# Altium PCB STAmeba.PcbDoc (part 1 of 3)
Units mm, origin at the board's own origin, x right, y up, seen from the top; angles counter-clockwise.
Board outline 121.75 x 98.31 mm, 2 copper layers (Top Layer, Bottom Layer); 122 components, 112 nets, 521 pads, 187 vias.
Unrouted connection lines stored in the file: 4.
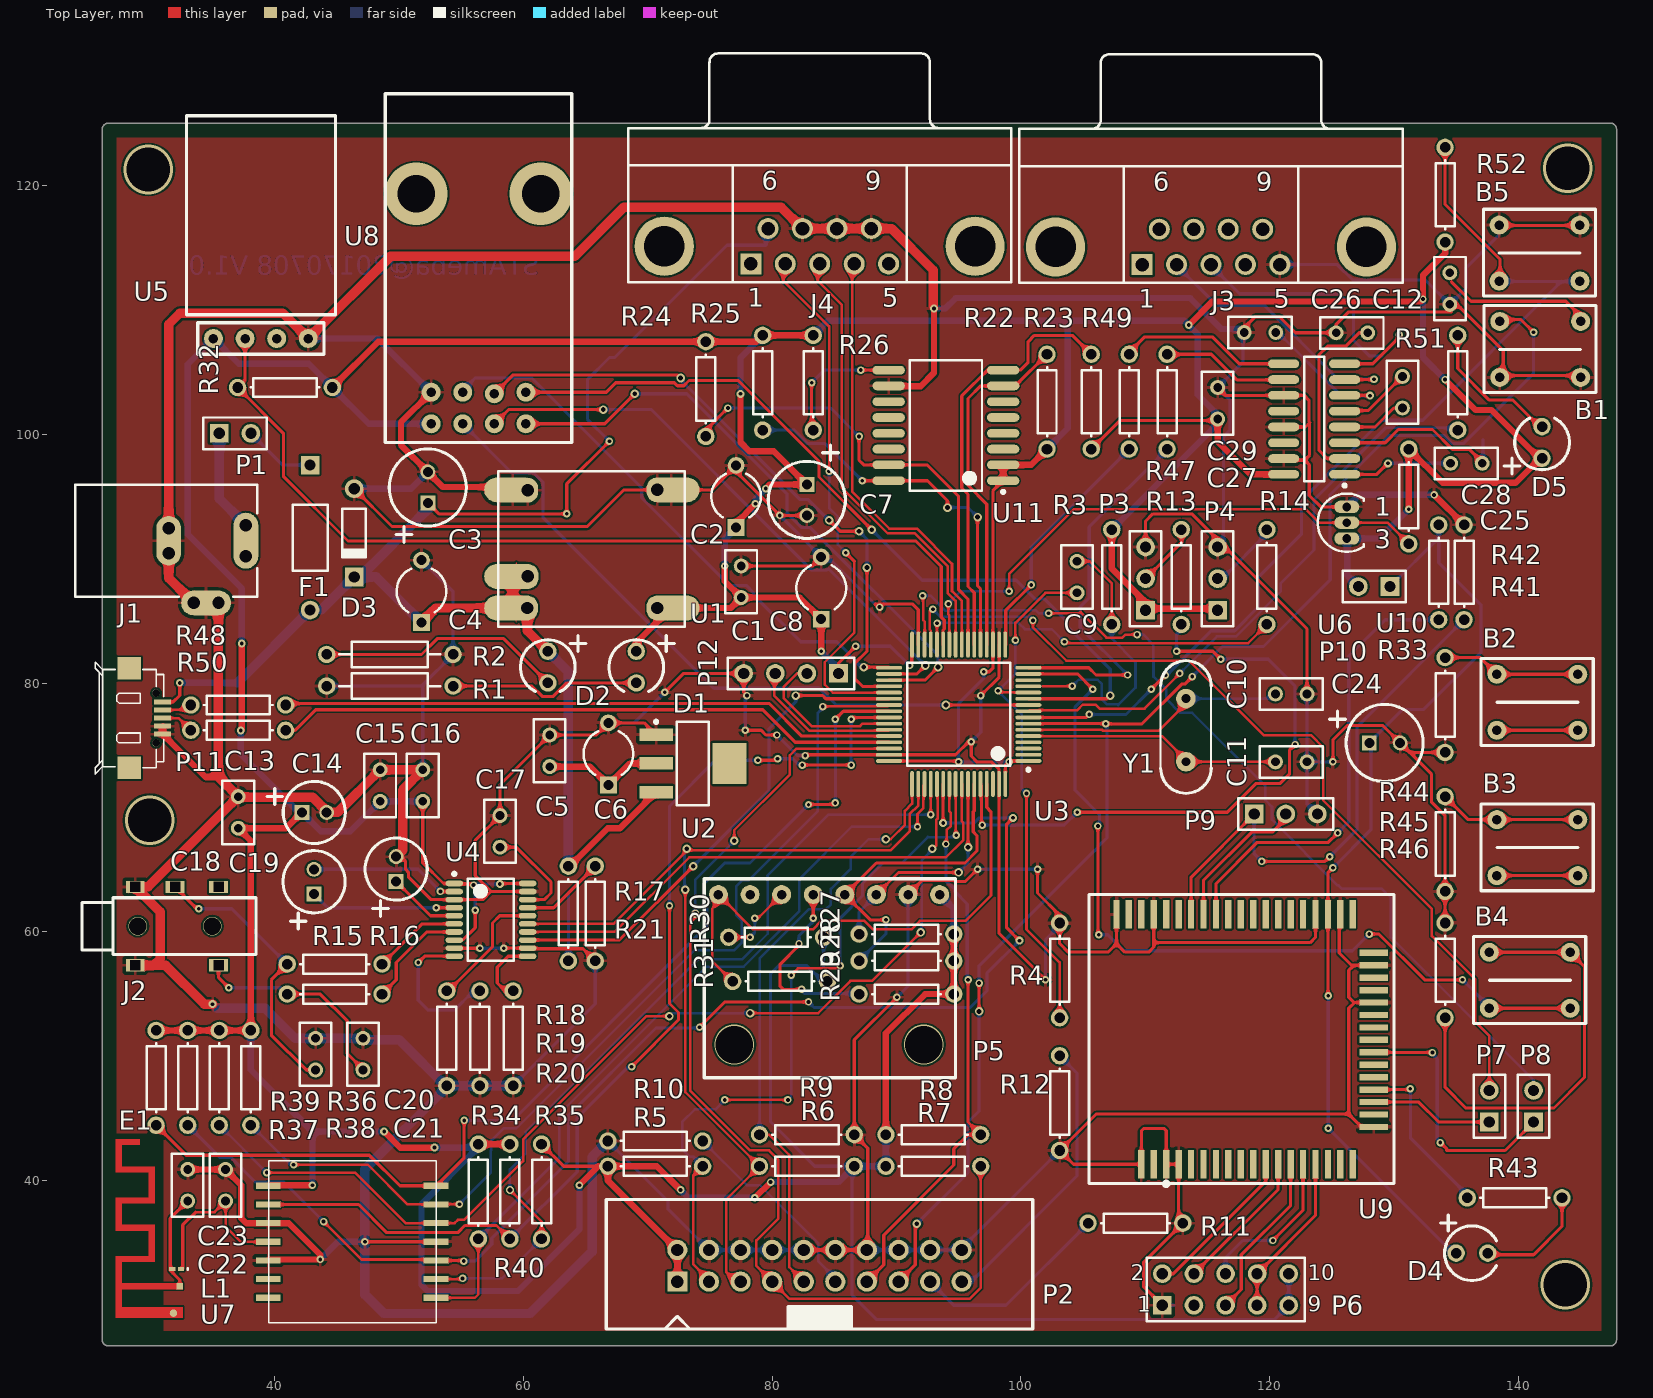
[diagram p0: Top Layer view]
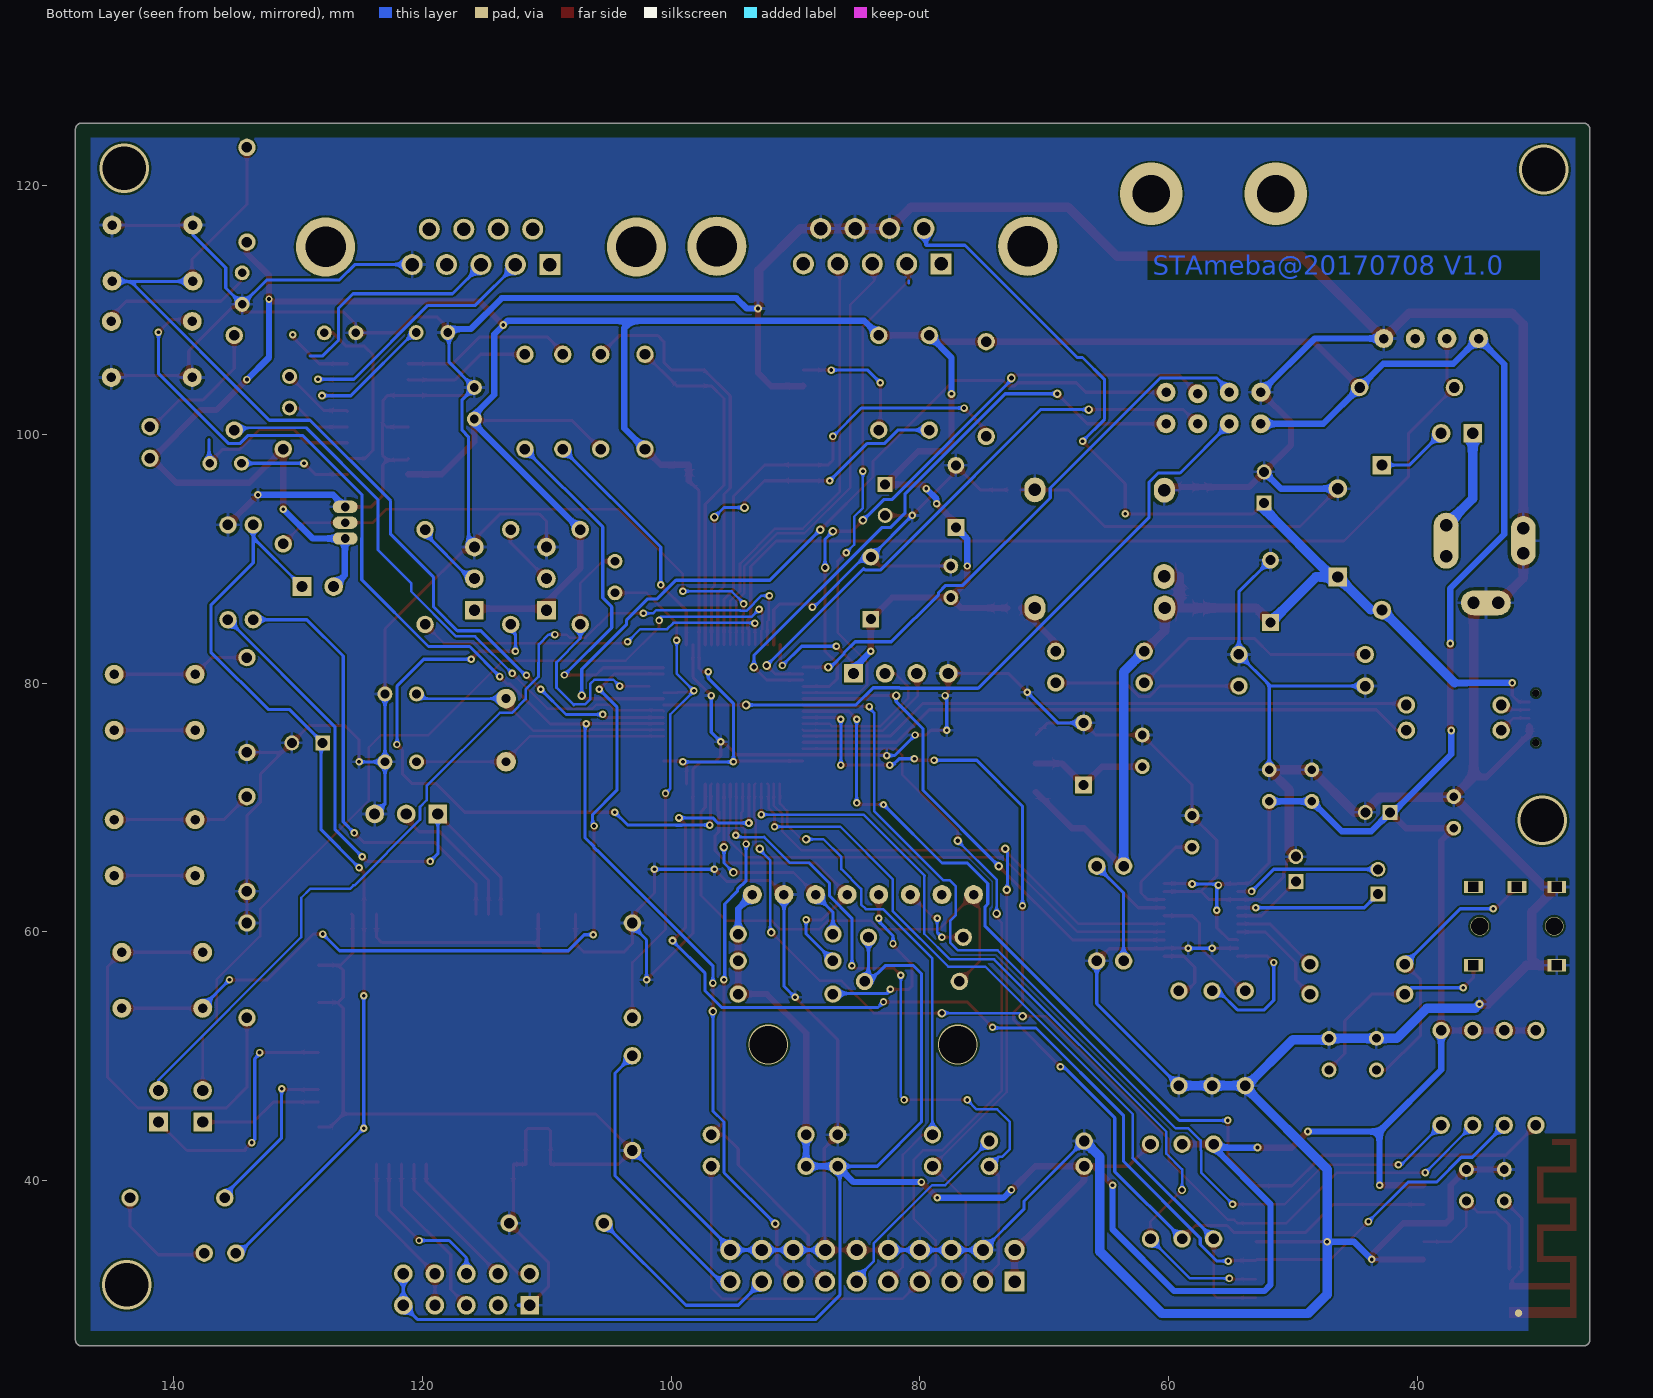
[diagram p1: Bottom Layer view, seen from below]

## Layer stack, top to bottom
Top Solder: solder mask 0.0102, Solder Resist, Dk 3.5
Top Layer: signal copper 0.0356
Dielectric 1: dielectric 0.32, FR-4, Dk 4.8
Bottom Layer: signal copper 0.0356
Bottom Solder: solder mask 0.0102, Solder Resist, Dk 3.5

## Board outline
26.645,26.703 cw(c26.645,27.203) 26.144,27.203 26.144,124.511 cw(c26.645,124.511) 26.645,125.011 147.396,125.011 cw(c147.396,124.511) 147.897,124.511 147.897,27.203 cw(c147.396,27.203) 147.396,26.703

## Design rules (kind name [scope] priority, off if disabled: settings)
Clearance [All] p1: gap=0.152 ignorepadtopadclearanceinfootprint=FALSE
DiffPairsRouting [InDifferentialPair('USB')] p1: maxlimit=0.254 minlimit=0.025 mostfreqgap=0.203 toplayer_minwidth=0.025 toplayer_maxwidth=0.381 toplayer_prefwidth=0.203 bottomlayer_minwidth=0.025 bottomlayer_maxwidth=0.381 bottomlayer_prefwidth=0.203 maxuncoupledlength=12.7
PolygonConnect [All] p1: connectstyle=Relief reliefconductorwidth=0.254 reliefentries=4 polygonreliefangle="90 Angle" airgapwidth=0.254
RoutingVias [All] p1: holewidth=0.686 width=0.381 viastyle="Through Hole" minholewidth=0.127 minwidth=0.254 maxholewidth=0.711 maxwidth=1.27
SolderMaskExpansion [All] p1: expansion=0.102
UnRoutedNet [All] p1: checkbadconnections=TRUE
Width [All] p1: maxlimit=1.27 minlimit=0.152 preferedwidth=0.381 minimp=50.000000 maximp=50.000000 favimp=50.000000
28 further rules are at their usual default settings.

## Classes and differential pairs
component class 01_Power: C1 C2 C3 C4 C5 C6 D1 D2 D3 F1 J1 P1 R1 R2 U1 U2
component class 02_MCU: B1 C7 C8 C9 C10 C11 C12 P2 P3 P4 R3 R4 R5 R6 R7 R8 R9 R10 R11 R12 R13 R14 U3 Y1
component class 03_PCM5102A: C13 C14 C15 C16 C17 C18 C19 C20 C21 J2 R15 R16 R17 R18 R19 R20 R21 U4
component class 04_Storage&Sensor: P5 R22 R23 R24 R25 R26 R27 R28 R29 R30 R31 R32 R33 U5 U6 U11 U*
component class 05_Wireless: C22 C23 E1 L1 R34 R35 R36 R37 R38 R39 R40 U7 U8
component class 06_RTL8711: B2 B3 B4 C24 D4 P6 P7 P8 P9 P10 R41 R42 R43 R44 R45 R46 U9
component class 07_Interface: B5 C25 C26 C27 C28 C29 D5 J3 J4 P11 P12 R47 R48 R49 R50 R51 R52 U10
differential pair USB: +USB_P -USB_N

## Components (designator, comment, footprint, x,y, rotation, side; value= is the part's Value field where it differs from the comment)
B1 "Reset" SWITCH-0.65/0.45 138.506,109.068 r0 top
B2 "Switch" SWITCH-0.65/0.45 138.28,80.7 r0 top
B3 "Switch" SWITCH-0.65/0.45 138.28,69.016 r0 top
B4 "Switch" SWITCH-0.65/0.45 137.668,58.348 r0 top
B5 "SW PUSHBUTTON" SWITCH-0.65/0.45 138.455,116.819 r0 top
C1 "Cap" RAD-0.1 77.521,88.138 r270 top value=100pF
C2 "Cap2" CAPR5-4X5 77.111,94.996 r90 top value=100pF
C3 "Cap Pol1" RB2.5-6.3 52.324,94.472 r90 top value=47uF
C4 "Cap2" CAPR5-4X5 51.816,87.376 r90 top value=0.1uF
C5 "Cap" RAD-0.1 62.123,74.549 r270 top value=100pF
C6 "Cap2" CAPR5-4X5 66.845,74.295 r90 top value=100pF
C7 "Cap Pol1" RB2.5-6.3 82.798,95.972 r270 top value=47uF
C8 "Cap2" CAPR5-4X5 83.954,87.63 r90 top value=0.1uF
C9 "Cap2" RAD-0.1 104.521,88.519 r270 top value=0.1uF
C10 "Cap" RAD-0.1 121.742,79.121 r180 top value=100pF
C11 "Cap" RAD-0.1 121.742,73.66 r180 top value=100pF
C12 "0.1uF/25V" RAD-0.1 134.493,111.709 r90 top value=100pF
C13 "CC0603KRX7R9BB104" RAD-0.1 37.084,69.596 r90 top
C14 "EEE-1HA100WR" RB2-5 43.196,69.596 r0 top
C15 "CC0603KRX7R9BB104" RAD-0.1 48.498,71.755 r90 top
C16 "CC0603KRX7R9BB104" RAD-0.1 51.92,71.755 r90 top
C17 "CC0603KRX7R9BB104" RAD-0.1 58.131,68.072 r90 top
C18 "LMK107B7225KA-T" RB2-5 43.18,64.024 r90 top
C19 "LMK107B7225KA-T" RB2-5 49.784,65.04 r90 top
C20 "2.2nF" RAD-0.1 43.303,50.165 r90 top
C21 "2.2nF" RAD-0.1 47.117,50.165 r90 top
C22 "Cap" RAD-0.1 36.068,39.624 r270 top value=NC
C23 "Cap" RAD-0.1 33.02,39.624 r270 top value=NC
C24 "" RB2.5-6.3 128,75.184 r0 top value=10uF
C25 "105" RAD-0.1 135.822,97.663 r180 top value=100pF
C26 "105" RAD-0.1 126.619,108.153 r180 top value=100pF
C27 "105" RAD-0.1 115.824,102.489 r90 top value=100pF
C28 "105" RAD-0.1 130.683,103.378 r270 top value=100pF
C29 "105" RAD-0.1 119.228,108.179 r180 top value=100pF
D1 "LED1" LED-R3.0 69.088,81.28 r0 top
D2 "LED1" LED-R3.0 61.976,81.28 r0 top
D3 "Diode 1N4733A" DO-35 46.404,92.075 r270 top
D4 "Satus LED1" LED-R3.0 136.271,34.163 r90 top
D5 "LED1" LED-R3.0 141.91,99.339 r180 top
E1 "Antenna" ANT_MEANDER_LINE 27.235,28.946 r90 top
F1 "Fuse 1" PIN-W2/E2.8 42.862,91.694 r270 top
J1 "PWR2.5" KLD-0202 23.996,91.44 r0 top
J2 "PJ-313" PJ-313 32.004,60.452 r0 top
J3 "Joypad" DSUB1.385-2H9 115.291,124.562 r0 top
J4 "Joypad" DSUB1.385-2H9 83.833,124.615 r0 top
L1 "Inductor" 0603 32.123,32.893 r180 top value=10pF
P1 "Header 2" HDR1X2 35.56,100.076 r0 top
P2 "Header 10X2" MHDR2X10_2.54 72.39,31.877 r0 top
P3 "Header 3" HDR1X3 110.029,85.852 r90 top
P4 "Header 3" HDR1X3 115.824,85.852 r90 top
P5 "GY521-MPU6050" GY521-MPU6050 93.472,62.992 r270 top
P6 "Header 5X2" HDR2X5 111.379,29.972 r0 top
P7 "Header 2" HDR1X2 137.668,44.704 r90 top
P8 "Header 2" HDR1X2 141.224,44.704 r90 top
P9 "Header 3" HDR1X3 118.761,69.469 r0 top
P10 "Header 2" HDR1X2 129.678,87.757 r180 top
P11 "Header 5" MICRO_USB 31.005,77.184 r270 top
P12 "Header 4" HDR1X4 85.344,80.772 r180 top
R1 "Res2" AXIAL-0.4 49.276,79.756 r0 top value=4.7K
R2 "Res2" AXIAL-0.4 49.276,82.296 r180 top value=4.7K
R3 "" AXIAL-0.3 107.315,88.519 r90 top value=0
R4 "10k" AXIAL-0.3 103.124,56.896 r90 top value=0
R5 "10k" AXIAL-0.3 70.612,41.148 r0 top
R6 "10k" AXIAL-0.3 82.804,41.148 r180 top
R7 "10k" AXIAL-0.3 92.964,41.148 r0 top
R8 "10k" AXIAL-0.3 92.964,43.688 r0 top
R9 "10k" AXIAL-0.3 82.804,43.688 r180 top
R10 "10k" AXIAL-0.3 70.612,43.18 r0 top
R11 "10k" AXIAL-0.3 109.22,36.576 r180 top
R12 "10k" AXIAL-0.3 103.124,46.228 r90 top value=47k
R13 "Res2" AXIAL-0.3 112.903,88.519 r90 top value=1K
R14 "Res2" AXIAL-0.3 119.786,88.519 r90 top value=1K
R15 "ERJ-3EKF4700V" AXIAL-0.3 44.833,57.404 r180 top
R16 "ERJ-3EKF4700V" AXIAL-0.3 44.833,54.991 r180 top
R17 "ERJ-3GEYJ182V" AXIAL-0.3 63.627,61.468 r90 top
R18 "RC0603JR-070RL" AXIAL-0.3 53.848,51.435 r90 top
R19 "RC0603JR-070RL" AXIAL-0.3 56.515,51.435 r90 top
R20 "RC0603JR-070RL" AXIAL-0.3 59.182,51.435 r90 top
R21 "ERJ-3GEYJ332V" AXIAL-0.3 65.786,61.468 r90 top
R22 "10k" AXIAL-0.3 102.108,102.616 r90 top value=1k
R23 "10k" AXIAL-0.3 105.664,102.616 r270 top value=1k
R24 "10k" AXIAL-0.3 74.676,103.632 r90 top value=1k
R25 "10k" AXIAL-0.3 79.248,104.14 r90 top value=1k
R26 "10k" AXIAL-0.3 83.312,104.14 r90 top value=1k
R27 "10k" AXIAL-0.3 90.805,59.817 r180 top value=4.7k
R28 "10k" AXIAL-0.3 90.805,57.658 r180 top value=4.7k
R29 "10k" AXIAL-0.3 90.805,54.991 r180 top value=4.7k
R30 "10k" AXIAL-0.3 80.327,59.563 r180 top value=4.7k
R31 "10k" AXIAL-0.3 80.645,56.007 r180 top value=4.7k
R32 "10k" AXIAL-0.3 40.841,103.759 r180 top value=4.7k
R33 "10k" AXIAL-0.3 131.192,94.996 r270 top value=4.7k
R34 "10k" AXIAL-0.3 56.388,39.116 r90 top value=4.7k
R35 "10k" AXIAL-0.3 61.468,39.116 r90 top value=4.7k
R36 "10k" AXIAL-0.3 33.02,48.26 r90 top value=4.7k
R37 "10k" AXIAL-0.3 35.56,48.26 r90 top value=4.7k
R38 "10k" AXIAL-0.3 38.1,48.26 r90 top value=4.7k
R39 "10k" AXIAL-0.3 30.48,48.26 r90 top value=4.7k
R40 "10k" AXIAL-0.3 58.928,39.116 r90 top value=4.7k
R41 "" AXIAL-0.3 135.636,88.9 r90 top value=10K
R42 "" AXIAL-0.3 133.604,88.9 r90 top value=10K
R43 "10k" AXIAL-0.3 139.7,38.608 r180 top
R44 "10k" AXIAL-0.3 134.112,78.232 r90 top
R45 "10k" AXIAL-0.3 134.112,67.056 r90 top
R46 "10k" AXIAL-0.3 134.112,56.896 r270 top
R47 "0" AXIAL-0.3 111.76,102.616 r90 top
R48 "Res2" AXIAL-0.3 37.084,78.232 r0 top value=4.7K
R49 "0" AXIAL-0.3 108.712,102.616 r90 top
R50 "Res2" AXIAL-0.3 37.084,76.2 r0 top value=4.7K
R51 "Res2" AXIAL-0.3 135.128,104.14 r90 top value=4.7K
R52 "10k" AXIAL-0.3 134.112,119.253 r270 top
U1 "MP1584" MP1584 65.517,90.779 r180 top
U2 "AMS1117-1.8V" SOT223-4M 73.631,73.533 r0 top
U3 "STM32F103RCT6" STM-LQFP64_M 95.008,77.482 r180 top
U4 "PCM5102A" TSSOP-20-1 57.404,60.96 r0 top
U5 "DHT11" DHT-11 35.094,107.696 r90 top
U6 "DS18B20" TO-92 126.213,92.888 r0 top
U7 "88W8782" W8782 52.997,28.576 r180 top
U8 "CC1101" AS07-M1101D-TH 52.593,100.838 r90 top
U9 "8711AF" "53PIN-MODULE-PLATFORM -2" 116.84,51.308 r90 top
U10 "MAX232ACPE" SO-16_M 123.585,101.219 r180 top
U11 "MX25L25635F" SOL-16_M 93.98,100.711 r180 top
Y1 "XTAL" XTAL1 113.281,78.74 r270 top

## Footprints (in the part's own frame and the unit in brackets; to place one, negate y for a bottom-side part, rotate by r counter-clockwise, add the part's x,y. Pads: shape width x height; smd on the part's side, far side on the other; paste and mask are expansions set on the pad)
"53PIN-MODULE-PLATFORM -2" [mil]
  rect 90x20 smd: 1(-393.7,202.76) 2(-393.7,163.39) 3(-393.7,124.02) 4(-393.7,84.65) 5(-393.7,45.28) 6(-393.7,5.91) 7(-393.7,-33.46) 8(-393.7,-72.83) 9(-393.7,-112.2) 10(-393.7,-151.57) 11(-393.7,-190.94) 12(-393.7,-230.31) 13(-393.7,-269.69) 14(-393.7,-309.06) 15(-393.7,-348.43) 16(-393.7,-387.8) 32(397.64,-387.8) 33(397.64,-348.43) 34(397.64,-309.06) 35(397.64,-269.69) 36(397.64,-230.31) 37(397.64,-190.94) 38(397.64,-151.57) 39(397.64,-112.2) 40(397.64,-72.83) 41(397.64,-33.46) 42(397.64,5.91) 43(397.64,45.28) 44(397.64,84.65) 45(397.64,124.02) 46(397.64,163.39) 47(397.64,202.76) 48(397.64,242.13) 49(397.64,281.5) 50(397.64,320.87) 51(397.64,360.24) 52(-393.7,281.5) 53(-393.7,242.13)
  rect 20x90 smd: 17(-275.59,-453.74) 18(-236.22,-453.74) 19(-196.85,-453.74) 20(-157.48,-453.74) 21(-118.11,-453.74) 22(-78.74,-453.74) 23(-39.37,-453.74) 24(0,-453.74) 25(39.37,-453.74) 26(78.74,-453.74) 27(118.11,-453.74) 28(157.48,-453.74) 29(196.85,-453.74) 30(236.22,-453.74) 31(275.59,-453.74)
  silkscreen extent -464,-518 461,447
0603 [mm] "Chip Inductor, Body 0.6x0.3mm, IPC High Density"
  rect 0.5x0.3 smd: 1(-0.35,0) 2(0.35,0)
  silkscreen extent -0.9,-0.05 -0.9,0.05, body extent -0.33,-0.18 0.33,0.18, height 0.55
ANT_MEANDER_LINE [mm]
  rect 0.5x0.5 smd: 1(2.55,-5.15)
  Top Layer region: 0,-5.4 0.9,-5.4 0.9,0 0,0
  Top Layer region: 0.002,-0.501 5.002,-0.501 5.002,-0.001 0.002,-0.001
  Top Layer region: 2.302,-5.401 2.802,-5.401 2.802,-0.001 2.302,-0.001
  Top Layer region: 4.502,-3.141 5.002,-3.141 5.002,-0.001 4.502,-0.001
  Top Layer region: 4.502,-3.14 7.502,-3.14 7.502,-2.64 4.502,-2.64
  Top Layer region: 7.002,-3.141 7.502,-3.141 7.502,-0.001 7.002,-0.001
  Top Layer region: 7.002,-0.501 9.702,-0.501 9.702,-0.001 7.002,-0.001
  Top Layer region: 9.202,-3.141 9.702,-3.141 9.702,-0.001 9.202,-0.001
  Top Layer region: 9.202,-3.14 12.202,-3.14 12.202,-2.64 9.202,-2.64
  Top Layer region: 11.702,-3.141 12.202,-3.141 12.202,-0.001 11.702,-0.001
  Top Layer region: 11.702,-0.501 14.402,-0.501 14.402,-0.001 11.702,-0.001
  Top Layer region: 13.9,-1.97 14.4,-1.97 14.4,0 13.9,0
AS07-M1101D-TH [mil] "AS07-M1101D-TH Footprint"
  round 60 hole 30: 1(0,0) 2(100,0) 3(0,-100) 4(100,-100) 5(0,-200) 6(95,-200) 7(0,-300) 8(100,-300)
  silkscreen extent -59,-445 1045,145
AXIAL-0.3 [mm] "Axial Device, Thru-Hole; 2 Leads; 0.3 in Pin Spacing"
  round 1.4 hole 0.85: 1(-3.81,0) 2(3.81,0)
  silkscreen extent -2.77,-0.76 2.77,0.76
AXIAL-0.4 [mm] "Axial Device, Thru-Hole; 2 Leads; 0.4 in Pin Spacing"
  round 1.4 hole 0.85: 1(-5.08,0) 2(5.08,0)
  silkscreen extent -4.06,-1.02 4.06,1.02
CAPR5-4X5 [mm] "Capacitor; 2 Leads"
  rect 1.35x1.35 hole 0.8: 1(-2.5,0)
  round 1.35 hole 0.8: 2(2.5,0)
  silkscreen extent -1.69,-2 1.82,2
DHT-11 [mil] "DHT11"
  round 60 hole 30: 1(0,0) 2(0,-100) 3(0,-200) 4(0,-300)
  silkscreen extent -50,-386 705,85
DO-35 [mm] "Diode, Axial; Body 3.8 x 1.9 mm (LxDia. max), Lead Dia. 0.53 mm (max)"
  round 1.5 hole 0.9: 1(-3.55,0)
  rect 1.5x1.5 hole 0.9: 2(3.55,0)
  silkscreen extent -1.95,-0.95 2.05,0.95
DSUB1.385-2H9 [mm] "Connector; D Subminiature; 9 Position; Right Angle; Pitch 1.385 mm"
  rect 1.69x1.69 hole 1.09: 1(-5.54,-10.92)
  round 1.69 hole 1.09: 2(-2.77,-10.92) 3(0,-10.92) 4(2.77,-10.92) 5(5.54,-10.92) 6(-4.155,-8.08) 7(-1.385,-8.08) 8(1.385,-8.08) 9(4.155,-8.08)
  round 4.76 hole 3.26: 10(-12.495,-9.5) 11(12.495,-9.5)
  silkscreen extent -15.4,-12.4 15.4,6
GY521-MPU6050 [mil] "MPU6050 Module"
  round 60 hole 30: 1(0,0) 2(0,-100) 3(0,-200) 4(0,-300) 5(0,-400) 6(0,-500) 7(0,-600) 8(0,-700)
  silkscreen extent -50,-745 580,50
HDR1X2 [mm] "Connector; Header; 2 Position"
  rect 1.5x1.5 hole 0.9: 1(0,0)
  round 1.5 hole 0.9: 2(2.54,0)
  silkscreen extent -1.27,-1.27 3.81,1.27
HDR1X3 [mm] "Connector; Header; 3 Position"
  rect 1.5x1.5 hole 0.9: 1(0,0)
  round 1.5 hole 0.9: 2(2.54,0) 3(5.08,0)
  silkscreen extent -1.27,-1.27 6.35,1.27
HDR1X4 [mm] "Connector; Header; 4 Position"
  rect 1.5x1.5 hole 0.9: 1(0,0)
  round 1.5 hole 0.9: 2(2.54,0) 3(5.08,0) 4(7.62,0)
  silkscreen extent -1.27,-1.27 8.89,1.27
HDR2X5 [mm] "Connector; Header; 5x2 Position"
  rect 1.5x1.5 hole 0.9: 1(0,0)
  round 1.5 hole 0.9: 2(0,2.54) 3(2.54,0) 4(2.54,2.54) 5(5.08,0) 6(5.08,2.54) 7(7.62,0) 8(7.62,2.54) 9(10.16,0) 10(10.16,2.54)
  silkscreen extent -1.27,-1.27 11.43,3.81
KLD-0202 [mm] "DC Power Jack, 2.5mm, KLD Series, PCB Mount"
  oval 2x4.5 all layers, no hole: 1(13.7,0)
  round 1.5 hole 1: 1A(13.7,-1.25) 1B(13.7,1.25) 2A(7.5,-1) 2B(7.5,1) 3A(9.5,-5) 3B(11.5,-5)
  oval 2x4 all layers, no hole: 2(7.5,0)
  oval 4x2 all layers, no hole: 3(10.5,-5)
  silkscreen extent 0,-4.5 14.6,4.5
LED-R3.0 [mm] "LED RED DIFF 3MM ROUND T/H"
  round 1.4 hole 0.85: 1(0,1.27) 2(0,-1.27)
  silkscreen extent -2.2,-1.97 3.05,2.54
MHDR2X10_2.54 [mil]
  rect 64x64 hole 39.37: 1(0,0)
  round 64 hole 39.37: 2(0,100) 3(100,0) 4(100,100) 5(200,0) 6(200,100) 7(300,0) 8(300,100) 9(400,0) 10(400,100) 11(500,0) 12(500,100) 13(600,0) 14(600,100) 15(700,0) 16(700,100) 17(800,0) 18(800,100) 19(900,0) 20(900,100)
  silkscreen extent -225,-150 1125,260
MICRO_USB [mm]
  rect 1.8x1.9 smd: 0(-4,-2.675) 0(4,-2.675)
  round 0.6 hole 0.6: 0(-2,-0.525) 0(2,-0.525)
  rect 0.4x1.35 smd: 1(-1.3,0) 2(-0.65,0) 3(0,0) 4(0.65,0) 5(1.3,0)
  silkscreen extent -4.5,-5.43 4.5,0.1
MP1584 [mm]
  oval 2.4x2 smd: 1(-7.455,4.751) 2(-7.455,-4.751) 3(7.455,-4.75) 4(7.455,2.211) 5(7.455,4.751)
  rect 2.2x2 smd: 1(-6.362,4.749) 2(-6.388,-4.751) 3(6.363,-4.751) 4(6.363,2.209) 5(6.363,4.749)
  oval 1.7x2 hole 1: 1(-5.245,4.751) 2(-5.245,-4.751) 3(5.169,-4.725) 4(5.144,2.211) 5(5.195,4.751)
  Top Layer lines w0.254: 5.804,2.412 5.728,2.336 ; 5.779,-4.598 5.728,-4.547
  Top Layer lines w0.4: -5.829,4.647 -5.905,4.571
  silkscreen extent -7.45,-6.25 7.55,6.25
PIN-W2/E2.8 [mm] "Thru-Hole; 2 Leads"
  rect 1.5x1.5 hole 0.9: 1(-5.825,0)
  round 1.5 hole 0.9: 2(5.825,0)
  silkscreen extent -2.65,-1.4 2.65,1.4
PJ-313 [mm] "3.5mm"
  rect 1.5x1 hole 0.8 square: 1(-3.2,-3.15) 1(-3.2,3.15) 2(3.5,-3.15) 2(3.5,3.15) 3(0,3.15)
  silkscreen extent -7.49,-2.29 6.5,2.29
RAD-0.1 [mm] "Radial Cap, Thru-Hole; 2 Leads; 0.1 in Pin Spacing"
  round 1.2 hole 0.7: 1(-1.27,0) 2(1.27,0)
  silkscreen extent -2.54,-1.27 2.54,1.27
RB2-5 [mm] "Capacitor (Radial); 2 Leads"
  rect 1.2x1.2 hole 0.8: 1(-1,0)
  round 1.2 hole 0.8: 2(1,0)
  silkscreen extent -3.81,-2.5 2.5,2.5
RB2.5-6.3 [mm]
  rect 1.2x1.2 hole 0.8: 1(0.016,0)
  round 1.2 hole 0.8: 2(2.5,0)
  silkscreen extent -3.17,-3.1 4.35,3.1
SO-16_M [mm] "SOIC, 16-Leads, Body 9.9x3.9mm, Pitch 1.27mm, IPC Low Density"
  oval 2.5x0.7 smd: 1(-2.45,4.445) 2(-2.45,3.175) 3(-2.45,1.905) 4(-2.45,0.635) 5(-2.45,-0.635) 6(-2.45,-1.905) 7(-2.45,-3.175) 8(-2.45,-4.445) 9(2.45,-4.445) 10(2.45,-3.175) 11(2.45,-1.905) 12(2.45,-0.635) 13(2.45,0.635) 14(2.45,1.905) 15(2.45,3.175) 16(2.45,4.445)
  silkscreen extent -2.58,-5 0.8,5.47, body extent -2,-5 2,5, height 1.75
SOL-16_M [mm] "16-Pin Small Outline Integrated Circuit 1.27 mm Pitch, IPC Low Density"
  oval 2.6x0.7 smd: 1(-4.6,4.445) 2(-4.6,3.175) 3(-4.6,1.905) 4(-4.6,0.635) 5(-4.6,-0.635) 6(-4.6,-1.905) 7(-4.6,-3.175) 8(-4.6,-4.445) 9(4.6,-4.445) 10(4.6,-3.175) 11(4.6,-1.905) 12(4.6,-0.635) 13(4.6,0.635) 14(4.6,1.905) 15(4.6,3.175) 16(4.6,4.445)
  silkscreen extent -4.72,-5.25 2.9,5.47, body extent -3.75,-5.25 3.75,5.25, height 2.65
SOT223-4M [mm] "SOT223, 4-Leads, Body 6.5x3.5mm, Pitch 2.3mm, Lead Span 7mm, IPC Low Density"
  rect 2.7x1 smd: 1(-2.95,2.3) 2(-2.95,0) 3(-2.95,-2.3)
  rect 2.7x3.3 smd: 4(2.95,0)
  silkscreen extent -3.07,-3.35 1.3,3.47, body extent -1.85,-3.35 1.85,3.35, height 1.8
STM-LQFP64_M [mm] "Thin QFP, 64-Leads, Body 10x10mm, Pitch 0.5mm, IPC Low Density"
  oval 2.1x0.3 smd: 1(-5.6,3.75) 2(-5.6,3.25) 3(-5.6,2.75) 4(-5.6,2.25) 5(-5.6,1.75) 6(-5.6,1.25) 7(-5.6,0.75) 8(-5.6,0.25) 9(-5.6,-0.25) 10(-5.6,-0.75) 11(-5.6,-1.25) 12(-5.6,-1.75) 13(-5.6,-2.25) 14(-5.6,-2.75) 15(-5.6,-3.25) 16(-5.6,-3.75) 33(5.6,-3.75) 34(5.6,-3.25) 35(5.6,-2.75) 36(5.6,-2.25) 37(5.6,-1.75) 38(5.6,-1.25) 39(5.6,-0.75) 40(5.6,-0.25) 41(5.6,0.25) 42(5.6,0.75) 43(5.6,1.25) 44(5.6,1.75) 45(5.6,2.25) 46(5.6,2.75) 47(5.6,3.25) 48(5.6,3.75)
  oval 0.3x2.1 smd: 17(-3.75,-5.6) 18(-3.25,-5.6) 19(-2.75,-5.6) 20(-2.25,-5.6) 21(-1.75,-5.6) 22(-1.25,-5.6) 23(-0.75,-5.6) 24(-0.25,-5.6) 25(0.25,-5.6) 26(0.75,-5.6) 27(1.25,-5.6) 28(1.75,-5.6) 29(2.25,-5.6) 30(2.75,-5.6) 31(3.25,-5.6) 32(3.75,-5.6) 49(3.75,5.6) 50(3.25,5.6) 51(2.75,5.6) 52(2.25,5.6) 53(1.75,5.6) 54(1.25,5.6) 55(0.75,5.6) 56(0.25,5.6) 57(-0.25,5.6) 58(-0.75,5.6) 59(-1.25,5.6) 60(-1.75,5.6) 61(-2.25,5.6) 62(-2.75,5.6) 63(-3.25,5.6) 64(-3.75,5.6)
  silkscreen extent -5.72,-4.15 4.15,4.57, body extent -5,-5 5,5, height 1.6
SWITCH-0.65/0.45 [mil] "Tactile Switch 0.65/0.45"
  round 60 hole 30: 1(0,0) 2(255.91,0) 3(0,-177.17) 4(255.91,-177.17)
  silkscreen extent -50,-225 305,50
TO-92 [mm] "TO, Flat Index; 3 In-Line, Axial Leads; Body Dia. 4.6mm; Leads 0.41 x 0.39 mm (max)"
  oval 2x1 hole 0.7: 1(0,1.27) 2(0,0) 3(0,-1.27)
  silkscreen extent -2.34,-2.34 1.35,2.34
TSSOP-20-1 [mm] "TSOP, 20-Leads, Body 6.50x4.40mm, Pitch 0.65mm, IPC Medium Density"
  oval 1.4x0.45 smd: 1(-2.95,2.925) 2(-2.95,2.275) 3(-2.95,1.625) 4(-2.95,0.975) 5(-2.95,0.325) 6(-2.95,-0.325) 7(-2.95,-0.975) 8(-2.95,-1.625) 9(-2.95,-2.275) 10(-2.95,-2.925) 11(2.95,-2.925) 12(2.95,-2.275) 13(2.95,-1.625) 14(2.95,-0.975) 15(2.95,-0.325) 16(2.95,0.325) 17(2.95,0.975) 18(2.95,1.625) 19(2.95,2.275) 20(2.95,2.925)
  silkscreen extent -3.07,-3.3 1.85,3.82, body extent -3.22,-3.3 3.33,3.3, height 1.2
W8782 [mm]
  rect 2x0.5 smd: 1(0,-2) 2(0,-3.5) 3(0,-5) 4(0,-6.5) 5(0,-8) 6(0,-9.5) 7(0,-11) 8(13.5,-11) 9(13.5,-9.5) 10(13.5,-8) 11(13.5,-6.5) 12(13.5,-5) 13(13.5,-3.5) 14(13.5,-2)
  silkscreen extent 0,-13 13.46,0
XTAL1 [mil]
  round 62 hole 28: 1(-0.36,-0.2) 2(199.64,-0.2)
  silkscreen extent -120,-80 300,80

## Part data
B1: library part "SW PUSHBUTTON", "Tactile Switch"
B2 B3 B4 B5: "Tactile Switch"
C1 C2 C4 C5 C6 C8 C9 C10 C11 C22 C23: "Capacitor", Publisher="Altium Limited"
  C1 C5 C10 C11 C22 C23: LatestRevisionDate=17-Jul-2002, LatestRevisionNote="Re-released for DXP Platform.", PackageDescription="Radial Cap, Thru-Hole; 2 Leads; 0.3 in Pin Spacing", PackageReference=RAD-0.3, Published=8-Jun-2000
  C2 C4 C6 C8 C9: PackageDescription="Capacitor; 2 Leads", PackageReference=CAPR5-4X5, Published=23-Sep-2002
C3 C7: "Polarized Capacitor (Radial)", LatestRevisionDate=17-Jul-2002, LatestRevisionNote="Re-released for DXP Platform.", PackageDescription="Polarized Capacitor (Radial); 2 Leads", PackageReference=RB7.6-15, Published=8-Jun-2000, Publisher="Altium Limited"
C12: library part CAP, "Capacitor", Published=8-Jun-2000, Publisher="Altium Limited", Revision="July-2002: Re-released for DXP Platform."
C13 C15 C16 C17: "CAP CER 0.1UF 50V 10% X7R 0603", Capacitance=0.1μF, Manufacturer=Yageo, Operating Temperature="-55°C ~ 125°C", Package / Case="0603 (1608 Metric)", Ratings=-, Supplier Part Number 1=311-1344-1-ND, Temperature Coefficient=X7R, Tolerance=±10%, Voltage - Rated=50V, Applications="General Purpose", Category=Capacitors, ComponentLink1Description=http://www.yageo.com/documents/recent/UPY-GPHC_X7R_6.3V-to-50V_8.pdf, ComponentLink1URL=http://www.yageo.com/documents/recent/UPY-GPHC_X7R_6.3V-to-50V_8.pdf, Features=-, Height - Seated (Max)=-, Lead Spacing=-, Lead Style=-, Manufacturer Part Number=CC0603KRX7R9BB104, Mounting Type="Surface Mount, MLCC", Packaging="Cut Tape (CT)", Pricing 1="10=0.027, 100=0.0123, 500=0.00858, 1000=0.00669 (USD)", RoHS="RoHS Compliant", Size / Dimension="0.063\" L x 0.031\" W (1.60mm x 0.80mm)", Stock 1=63780, Supplier 1=Digi-Key, Thickness (Max)="0.031\" (0.80mm)"
C14: "CAP ALUM 10UF 50V 20% SMD", Capacitance=10μF, ESR (Equivalent Series Resistance)=-, Lifetime @ Temp.="1000 Hrs @ 85°C", Manufacturer="Panasonic Electronic Components", Operating Temperature="-40°C ~ 85°C", Package / Case="Radial, Can - SMD", Ripple Current=27mA, Supplier Part Number 1=PCE3915CT-ND, Tolerance=±20%, Voltage Rating=50V, Applications=Automotive, Category=Capacitors, ComponentLink1Description=http://industrial.panasonic.com/www-cgi/jvcr13pz.cgi?E+PZ+3+ABA0002+EEE1HA100WR+7+WW, ComponentLink1URL=http://industrial.panasonic.com/www-cgi/jvcr13pz.cgi?E+PZ+3+ABA0002+EEE1HA100WR+7+WW, Height - Seated (Max)="0.213\" (5.40mm)", Impedance=-, Lead Spacing=-, Manufacturer Part Number=EEE-1HA100WR, Mounting Type="Surface Mount", Packaging="Cut Tape (CT)", Pricing 1="1=0.44, 10=0.345, 25=0.2904, 50=0.249, 100=0.2076, 250=0.15568, 500=0.13284 (USD)", RoHS="RoHS Compliant", Size / Dimension="0.197\" Dia (5.00mm)", Stock 1=3860, Supplier 1=Digi-Key, Surface Mount Land Size="0.209\" L x 0.209\" W (5.30mm x 5.30mm)", Type=-
C18 C19: "CAP CER 2.2UF 10V 10% X7R 0603", Capacitance=2.2μF, Manufacturer="Taiyo Yuden", Operating Temperature="-55°C ~ 125°C", Package / Case="0603 (1608 Metric)", Ratings=-, Supplier Part Number 1=587-2983-1-ND, Temperature Coefficient=X7R, Tolerance=±10%, Voltage - Rated=10V, Applications="General Purpose", Category=Capacitors, ComponentLink1Description=http://www.yuden.co.jp/or/product/category/capacitor/LMK107B7225KA-T.pdf, ComponentLink1URL=http://www.yuden.co.jp/or/product/category/capacitor/LMK107B7225KA-T.pdf, Features=-, Height - Seated (Max)=-, Lead Spacing=-, Lead Style=-, Manufacturer Part Number=LMK107B7225KA-T, Mounting Type="Surface Mount, MLCC", Packaging="Cut Tape (CT)", Pricing 1="1=0.32, 10=0.24, 50=0.14, 100=0.112, 250=0.08, 500=0.0544, 1000=0.044 (USD)", RoHS="RoHS Compliant", Size / Dimension="0.063\" L x 0.031\" W (1.60mm x 0.80mm)", Stock 1=15080, Supplier 1=Digi-Key, Thickness (Max)="0.035\" (0.90mm)"
C20 C21: library part C0603C222K5RACTU, "CAP CER 2200PF 50V 10% X7R 0603", Capacitance=2200pF, Manufacturer=Kemet, Operating Temperature="-55°C ~ 125°C", Package / Case="0603 (1608 Metric)", Ratings=-, Supplier Part Number 1=399-1085-1-ND, Temperature Coefficient=X7R, Tolerance=±10%, Voltage - Rated=50V, Applications="General Purpose", Category=Capacitors, ComponentLink1Description=http://www.kemet.com/docfinder?Partnumber=C0603C222K5RACTU, ComponentLink1URL=http://www.kemet.com/docfinder?Partnumber=C0603C222K5RACTU, Features=-, Height - Seated (Max)=-, Lead Spacing=-, Lead Style=-, Manufacturer Part Number=C0603C222K5RACTU, Mounting Type="Surface Mount, MLCC", Packaging="Cut Tape (CT)", Pricing 1="1=0.1, 10=0.029, 25=0.0208, 50=0.016, 100=0.0135, 250=0.011, 1000=0.0072 (USD)", RoHS="RoHS Compliant", Size / Dimension="0.063\" L x 0.031\" W (1.60mm x 0.80mm)", Stock 1=114644, Supplier 1=Digi-Key, Thickness (Max)="0.034\" (0.87mm)"
C24: library part "Cap Semi", "Capacitor (Semiconductor SIM Model)", LatestRevisionDate=17-Jul-2002, LatestRevisionNote="Re-released for DXP Platform.", PackageReference=C1206, Published=8-Jun-2000, Publisher="Altium Limited"
C25 C26 C27 C28 C29: library part Cap, "Capacitor", LatestRevisionDate=17-Jul-2002, LatestRevisionNote="Re-released for DXP Platform.", PackageReference=RAD-0.3, Published=8-Jun-2000, Publisher="Altium Limited"
D1 D2 D5: "Typical RED GaAs LED", LatestRevisionDate=08-Jul-2005, LatestRevisionNote="Mech Layer 1 removed.", PackageDescription="LED; 2 Leads", PackageReference=LED-1, Published=8-Jun-2000, Publisher="Altium Limited"
D3: "DIODE ZENER 5.1V 1W DO41", Ir - Reverse Current="10 uA", Manufacturer=Diodes, Manufacturer Part Number=1N4733A-T, Maximum Operating Temperature="+ 175 C", Minimum Operating Temperature="- 65 C", Package / Case=DO-41, Pd - Power Dissipation="1 W", Voltage Temperature Coefficient="0.015 %/C", Voltage Tolerance="5 %", Vz - Zener Voltage="5.1 V", &lt;PCN&gt;=http://www.mouser.com/PCN/Diodes_Inc_2126.pdf, Brand="Diodes Incorporated", Code_JEDEC=DO-204-AH, ComponentLink1Description="Manufacturer Link", ComponentLink1URL=http://www.fairchildsemi.com/, ComponentLink2Description=Datasheet, ComponentLink2URL=http://www.fairchildsemi.com/ds/1N%2F1N4448.pdf, ComponentLink3Description=https://datasheet.ciiva.com/25927/ds18007-25927157.pdf, ComponentLink3URL=https://datasheet.ciiva.com/25927/ds18007-25927157.pdf, ComponentLink4Description=https://datasheet.ciiva.com/10639/ds18007-10639654.pdf, ComponentLink4URL=https://datasheet.ciiva.com/10639/ds18007-10639654.pdf, ComponentLink5Description=https://datasheet.ciiva.com/8346/ds18007-8346231.pdf, ComponentLink5URL=https://datasheet.ciiva.com/8346/ds18007-8346231.pdf, ComponentLink6Description=https://datasheet.ciiva.com/892/ds18007-892024.pdf, ComponentLink6URL=https://datasheet.ciiva.com/892/ds18007-892024.pdf, ComponentLink7Description=https://datasheet.ciiva.com/892/ds18007-892025.pdf, ComponentLink7URL=https://datasheet.ciiva.com/892/ds18007-892025.pdf, ComponentLink8Description=https://datasheet.ciiva.com/15219/getdatasheetpartid-295066-15219562.pdf, ComponentLink8URL=https://datasheet.ciiva.com/15219/getdatasheetpartid-295066-15219562.pdf, ComponentLink9Description=https://datasheet.ciiva.com/34302/1538030-34302347.pdf, ComponentLink9URL=https://datasheet.ciiva.com/34302/1538030-34302347.pdf, ComponentLink10Description=https://datasheet.ciiva.com/16203/ds18007-16203966.pdf, ComponentLink10URL=https://datasheet.ciiva.com/16203/ds18007-16203966.pdf, Configuration=Single, DatasheetVersion=1997, Factory Pack Quantity=5000, Height="2.71 mm", LatestRevisionDate=17-Jul-2002, LatestRevisionNote="Re-released for DXP Platform.", Length="4.7 mm", Mounting Style="Through Hole", PackageDescription="Diode, Axial; Body 3.8 x 1.9 mm (LxDia. max), Lead Dia. 0.53 mm (max)", PackageReference=DO-35, Packaging=Reel, Pricing 1="1=0.43, 10=0.306, 25=0.238, 100=0.1802, 250=0.1274, 500=0.102, 1000=0.0782, 2500=0.068 (USD)", Product Category="Zener Diodes", Published=8-Jun-2000, Publisher="Altium Limited", RoHS=True, Series=1N47, Stock 1=0, Supplier 1=Digikey, Unit Weight="0.010582 oz", Width="2.71 mm", Zz - Zener Impedance="7 Ohms"
D4: library part LED1, "Typical RED GaAs LED", LatestRevisionDate=08-Jul-2005, LatestRevisionNote="Mech Layer 1 removed.", PackageDescription="LED; 2 Leads", PackageReference=LED-1, Published=8-Jun-2000, Publisher="Altium Limited"
E1: "Generic Antenna", LatestRevisionDate=17-Jul-2002, LatestRevisionNote="Re-released for DXP Platform.", PackageReference=PIN1, Published=24-Mar-1999, Publisher="Altium Limited"
F1: "Fuse", LatestRevisionDate=17-Jul-2002, LatestRevisionNote="Re-released for DXP Platform.", PackageDescription="Thru-Hole; 2 Leads", PackageReference=PIN-W2/E2.8, Published=8-Jun-2000, Publisher="Altium Limited"
J1: "Low Voltage Power Supply Connector", ComponentLink1Description="Manufacturer Link", ComponentLink1URL=http://domino.kycon.com/internet/Products.html, DatasheetDocument=09-May-2002, Published=17-Dec-2003, Publisher="Altium Limited"
J2: "3.5mm Audio Jack"
J3 J4: library part "D Connector 9", "Receptacle Assembly, 9 Position, Right Angle", PackageDocument=O, DatasheetDocument=1-Sep-1999, Gender=Receptacle, LatestRevisionDate=17-Jul-2002, LatestRevisionNote="Re-released for DXP Platform.", Orientation="Right Angle", PackageReference=788750, Positions=9, Published=15-Jun-2001, Publisher="Altium Limited"
P1 P7 P8 P10: "Header, 2-Pin", LatestRevisionDate=17-Jul-2002, LatestRevisionNote="Re-released for DXP Platform.", Publisher="Altium Limited"
P2: "Header, 10-Pin, Dual row", LatestRevisionDate=17-Jul-2002, LatestRevisionNote="Re-released for DXP Platform.", Publisher="Altium Limited"
P3 P4 P9: "Header, 3-Pin", LatestRevisionDate=17-Jul-2002, LatestRevisionNote="Re-released for DXP Platform.", Publisher="Altium Limited"
P5: "INVENSENSE   MPU-6050   MEMS Module, Tri-Axis Gyroscope, Tri-Axis Accelerometer, 2.5 V, 3.6 V, QFN, 24 Pins", Manufacturer=Invensense, Manufacturer Part Number=MPU-6050, Standard Package=5,000, Category="Sensors, Transducers", ComponentLink1Description=https://datasheet.ciiva.com/1513/1788002-1513632.pdf, ComponentLink1URL=https://datasheet.ciiva.com/1513/1788002-1513632.pdf, ComponentLink2Description=https://datasheet.ciiva.com/22731/1788002-22731434.pdf, ComponentLink2URL=https://datasheet.ciiva.com/22731/1788002-22731434.pdf, Dynamic Catalog="MPU-6000? Series", Family=Multifunction, Featured Product="MPU-6050 6-Axis, Integrated I2C Solution", Online Catalog="MPU-6000? Series", Other Names="1428-1007-2 / MPU6050", Output Type=Digital, Pricing 1="5000=3.4979 (USD)", Sensor Type="Motion Tracking", Stock 1=10000, Supplier 1=Digikey, Unit PriceUSD=Digital
P6: "Header, 5-Pin, Dual row", LatestRevisionDate=17-Jul-2002, LatestRevisionNote="Re-released for DXP Platform.", Publisher="Altium Limited"
P11: "Header, 5-Pin", LatestRevisionDate=17-Jul-2002, LatestRevisionNote="Re-released for DXP Platform.", Publisher="Altium Limited"
P12: "Header, 4-Pin", LatestRevisionDate=17-Jul-2002, LatestRevisionNote="Re-released for DXP Platform.", Publisher="Altium Limited"
R1 R2 R13 R14 R48 R50 R51: "Resistor", LatestRevisionDate=17-Jul-2002, LatestRevisionNote="Re-released for DXP Platform.", PackageDescription="Axial Device, Thru-Hole; 2 Leads; 0.4 in Pin Spacing", PackageReference=AXIAL-0.4, Published=8-Jun-2000, Publisher="Altium Limited"
R3 R4 R5 R6 R7 R8 R9 R10 R11 R12 R22 R23 R24 R25 R26 R27 R28 R29 R30 R31 R32 R33 R34 R35 R36 R37 R38 R39 R40 R43 R44 R45 R46 R52: library part Res1, "贴片电阻", LatestRevisionDate=17-Jul-2002, LatestRevisionNote="Re-released for DXP Platform.", PackageReference=AXIAL-0.4, Published=8-Jun-2000, Publisher="Altium Limited"
R15 R16: "RES 470 OHM 1% 1/10W 0603 SMD", Manufacturer="Panasonic Electronic Components", Operating Temperature="-55°C ~ 155°C", Package / Case="0603 (1608 Metric)", Power (Watts)="0.1W, 1/10W", Resistance (Ohms)=470, Supplier Device Package=0603, Supplier Part Number 1=P470HCT-ND, Temperature Coefficient=±100ppm/°C, Tolerance=±1%, Category=Resistors, ComponentLink1Description=http://industrial.panasonic.com/www-cgi/jvcr13pz.cgi?E+PZ+3+AOA0002+ERJ3EKF4700V+7+WW, ComponentLink1URL=http://industrial.panasonic.com/www-cgi/jvcr13pz.cgi?E+PZ+3+AOA0002+ERJ3EKF4700V+7+WW, Composition="Thick Film", Features="Automotive AEC-Q200", Height="0.022\" (0.55mm)", Manufacturer Part Number=ERJ-3EKF4700V, Number of Terminations=2, Packaging="Cut Tape (CT)", Pricing 1="1=0.1, 50=0.015, 100=0.0114, 250=0.00844, 500=0.00624, 1000=0.00416, 2500=0.00351 (USD)", RoHS="RoHS Compliant", Size / Dimension="0.063\" L x 0.031\" W (1.60mm x 0.80mm)", Stock 1=189242, Supplier 1=Digi-Key
R17: "RES 1.8K OHM 1/10W 5% 0603 SMD", Manufacturer="Panasonic Electronic Components", Package / Case="0603 (1608 Metric)", Power (Watts)="0.1W, 1/10W", Resistance (Ohms)=1.8k, Supplier Device Package=0603, Supplier Part Number 1=P1.8KGCT-ND, Temperature Coefficient=±200ppm/°C, Tolerance=±5%, Category=Resistors, ComponentLink1Description=http://industrial.panasonic.com/www-cgi/jvcr13pz.cgi?E+PZ+3+AOA0001+ERJ3GEYJ182V+7+WW, ComponentLink1URL=http://industrial.panasonic.com/www-cgi/jvcr13pz.cgi?E+PZ+3+AOA0001+ERJ3GEYJ182V+7+WW, Composition="Thick Film", Features=-, Height="0.022\" (0.55mm)", Manufacturer Part Number=ERJ-3GEYJ182V, Number of Terminations=2, Packaging="Cut Tape (CT)", Pricing 1="1=0.1, 50=0.0092, 100=0.007, 250=0.0052, 500=0.00384, 1000=0.00256 (USD)", RoHS="RoHS Compliant", Size / Dimension="0.063\" L x 0.031\" W (1.60mm x 0.80mm)", Stock 1=164571, Supplier 1=Digi-Key
R18 R19 R20: "RES 0.0 OHM 1/10W 0603 SMD", Manufacturer=Yageo, Package / Case="0603 (1608 Metric)", Power (Watts)="0.1W, 1/10W", Resistance (Ohms)=0.0, Supplier Part Number 1=311-0.0GRCT-ND, Temperature Coefficient=-, Tolerance=Jumper, Category=Resistors, ComponentLink1Description=http://www.yageo.com/documents/recent/PYu-RC0603_51_RoHS_L_4.pdf, ComponentLink1URL=http://www.yageo.com/documents/recent/PYu-RC0603_51_RoHS_L_4.pdf, Composition="Thick Film", Features=-, Height="0.022\" (0.55mm)", Manufacturer Part Number=RC0603JR-070RL, Number of Terminations=2, Packaging="Cut Tape (CT)", Pricing 1="10=0.01, 100=0.0048, 500=0.00294, 1000=0.00207 (USD)", RoHS="RoHS Compliant", Size / Dimension="0.063\" L x 0.031\" W (1.60mm x 0.80mm)", Stock 1=405251, Supplier 1=Digi-Key
R21: "RES 3.3K OHM 5% 1/10W 0603 SMD", Manufacturer="Panasonic Electronic Components", Operating Temperature="-55°C ~ 155°C", Package / Case="0603 (1608 Metric)", Power (Watts)="0.1W, 1/10W", Resistance (Ohms)=3.3k, Supplier Device Package=0603, Supplier Part Number 1=P3.3KGCT-ND, Temperature Coefficient=±200ppm/°C, Tolerance=±5%, Category=Resistors, ComponentLink1Description=http://industrial.panasonic.com/www-cgi/jvcr13pz.cgi?E+PZ+3+AOA0001+ERJ3GEYJ332V+7+WW, ComponentLink1URL=http://industrial.panasonic.com/www-cgi/jvcr13pz.cgi?E+PZ+3+AOA0001+ERJ3GEYJ332V+7+WW, Composition="Thick Film", Features="Automotive AEC-Q200", Height="0.022\" (0.55mm)", Manufacturer Part Number=ERJ-3GEYJ332V, Number of Terminations=2, Packaging="Cut Tape (CT)", Pricing 1="1=0.1, 50=0.0126, 100=0.0096, 250=0.00716, 500=0.00528, 1000=0.00352, 2500=0.00297 (USD)", RoHS="RoHS Compliant", Size / Dimension="0.063\" L x 0.031\" W (1.60mm x 0.80mm)", Stock 1=491357, Supplier 1=Digi-Key
R41 R42: library part Res3, "Resistor", LatestRevisionDate=04-Mar-2005, LatestRevisionNote="PCB Footprint replaced.", PackageReference=J1-0603, Published=8-Jun-2000, Publisher="Altium Limited"
R47 R49: library part Res2, "Resistor", LatestRevisionDate=17-Jul-2002, LatestRevisionNote="Re-released for DXP Platform.", PackageReference=AXIAL-0.4, Published=8-Jun-2000, Publisher="Altium Limited"
U1: "3.3V Voltage Regulators - Switching Regulators 3A 1.5MHz 28V Nonsync Buck", Input Voltage="4.5 V", Input Voltage MAX="28 V", Manufacturer="Monolithic Power Systems (MPS)", Manufacturer Part Number=MP1584EN-LF, Operating Supply Voltage="4.5 V to 28 V", Operating Temperature Range="- 20 C to + 85 C", Output Current="3 A", Output Voltage="3.3 V", Package / Case=SOIC-8, Switching Frequency="1.5 MHz", Brand="Monolithic Power Systems (MPS)", ComponentLink1Description=http://www.monolithicpower.com/Lists/Product_NonSynchronous%20Switcher_5727/DispForm.aspx?ID=77, ComponentLink1URL=http://www.monolithicpower.com/Lists/Product_NonSynchronous%20Switcher_5727/DispForm.aspx?ID=77, Factory Pack Quantity=100, Mounting Style=SMD/SMT, Number of Outputs="1 Output", Packaging=Tube, Pricing 1="100=2.1525 (USD)", Product Category="Voltage Regulators - Switching Regulators", RoHS=Details, Series=MP1584EN, Stock 1=0, Supplier 1=Digikey, Topology=Buck
U2: library part AMS1117, "AM1117", Dropout Voltage Vdo=1.1V, Input Voltage MAX=15V, Input Voltage Min=1.4V, LDO Regulator Case Style=SOT-223, Manufacturer=STMicroelectronics, Manufacturer Part Number=LD1117S-12TR, Operating Temperature Max=125°C, Operating Temperature Min=0°C, Output Current=800mA, Output Voltage Nom.=1.2V, ComponentLink1Description=https://datasheet.ciiva.com/1511/1776449-1511569.pdf, ComponentLink1URL=https://datasheet.ciiva.com/1511/1776449-1511569.pdf, ComponentLink2Description=https://datasheet.ciiva.com/2053/cd00000544-2053511.pdf, ComponentLink2URL=https://datasheet.ciiva.com/2053/cd00000544-2053511.pdf, ComponentLink3Description=https://datasheet.ciiva.com/2053/cd00000544-2053512.pdf, ComponentLink3URL=https://datasheet.ciiva.com/2053/cd00000544-2053512.pdf, ComponentLink4Description=https://datasheet.ciiva.com/2053/cd00000544-2053513.pdf, ComponentLink4URL=https://datasheet.ciiva.com/2053/cd00000544-2053513.pdf, ComponentLink5Description=https://datasheet.ciiva.com/29696/1390207-29696618.pdf, ComponentLink5URL=https://datasheet.ciiva.com/29696/1390207-29696618.pdf, ComponentLink6Description=https://datasheet.ciiva.com/7992/1776449-7992619.pdf, ComponentLink6URL=https://datasheet.ciiva.com/7992/1776449-7992619.pdf, ComponentLink7Description=https://datasheet.ciiva.com/41440/001185296-da-01-en-ic-reg-ldo-1-2v-ld1117s12tr-sot-223-stm-41440310.pdf, ComponentLink7URL=https://datasheet.ciiva.com/41440/001185296-da-01-en-ic-reg-ldo-1-2v-ld1117s12tr-sot-223-stm-41440310.pdf, MSL="MSL 1 - Unlimited", No. of Pins=3Pins, Packaging="Cut Tape", Pricing 1="2500=0.155, 5000=0.145, 12500=0.135, 25000=0.128, 62500=0.125 (USD)", Product Range="LD1117 Series", Stock 1=2500, Supplier 1=Digikey, SVHC="No SVHC (17-Dec-2015)"
U3: "ARM Cortex-M3 32-bit MCU, 256 KB Flash, 48 KB Internal RAM, 51 I/Os, 64-pin LQFP, -40 to 85 degC, Tray", I/Os (High Current)=51, Operating Frequency(F) (Processor speed) (MHz)=72, Supplier Part Number 1=497-9033-ND, Supply Voltage(Vcc) min (V)=2, A/D Converter="3x12-bit (16 Channel)", ComponentLink1Description="Manufacturer URL", ComponentLink1URL=http://www.st.com/web/en/home.html, ComponentLink2Description=Datasheet, ComponentLink2URL=http://www.st.com/st-web-ui/static/active/en/resource/technical/document/datasheet/CD00191185.pdf, ComponentLink3Description="Package Specification", ComponentLink3URL=http://www.st.com/st-web-ui/static/active/en/resource/technical/document/datasheet/DM00037051.pdf, Core="ARM Cortex-M3", D/A Converter="2x12-bit (2 Channel)", DatasheetVersion="Rev. 8", FLASH Size (Prog) (kB)=256, Internal RAM Size (kB)=48, Mounting Technology="Surface Mount", PackageDescription="64-Pin Low Profile Quad Flat Package, 10 x 10 mm Body, 0.5 mm Pitch", PackageReference=LQFP64, PackageVersion="Rev. 4, 06/2013", Packing=Tray, PartNumber=STM32F103RCT6, Supplier 1=Digi-Key, Supplier 2=Newark, Supplier 3=Newark, Supplier 4=Mouser, Supplier Part Number 2=01P4099, Supplier Part Number 3=57P1227, Supplier Part Number 4=511-STM32F103RCT6
U4: library part PCM5102APWR, "IC DAC 16/24/32BIT SRL 20TSSOP", Manufacturer="Texas Instruments", Operating Temperature="-25°C ~ 85°C", Package / Case="20-TSSOP (0.173\", 4.40mm Width)", Supplier Device Package=20-TSSOP, Supplier Part Number 1=296-36707-1-ND, Voltage Supply Source="Analog and Digital", Category="Integrated Circuits (ICs)", ComponentLink1Description=http://www.ti.com/lit/ds/symlink/pcm5102a.pdf, ComponentLink1URL=http://www.ti.com/lit/ds/symlink/pcm5102a.pdf, Data Interface="PCM, Serial", Manufacturer Part Number=PCM5102APWR, Mounting Type="Surface Mount", Number of Bits="16, 24, 32", Number of Converters=2, Number of Outputs and Type="2 Voltage", Packaging="Cut Tape (CT)", Pricing 1="1=5.44, 10=4.876, 25=4.3848, 100=3.9879, 250=3.60992, 500=3.2319, 750=2.92951, 1000=2.7216 (USD)", RoHS="RoHS Compliant", Sampling Rate (Per Second)="8k ~ 384k", Settling Time=-, Stock 1=4057, Supplier 1=Digi-Key
U5: Manufacturer=Sensirion, Manufacturer Part Number=SHT11, Operating Temperature Max=125°C, Operating Temperature Min=-40°C, Package / Case="4-LCC SMD", Sensor Case Style=LCC, Supply Voltage=3.3V, Accuracy %=3%, ComponentLink1Description=https://datasheet.ciiva.com/1293/sensirion-humidity-sht1x-datasheet-v5-1293456.pdf, ComponentLink1URL=https://datasheet.ciiva.com/1293/sensirion-humidity-sht1x-datasheet-v5-1293456.pdf, ComponentLink2Description=https://datasheet.ciiva.com/23951/317085-23951520.pdf, ComponentLink2URL=https://datasheet.ciiva.com/23951/317085-23951520.pdf, ComponentLink3Description=https://datasheet.ciiva.com/22712/1563786-22712371.pdf, ComponentLink3URL=https://datasheet.ciiva.com/22712/1563786-22712371.pdf, Humidity Accuracy ?=3%, Humidity Accuracy ±=3%, Humidity Range="0% to 100% Relative Humidity", Humidity Sensor Type=Capacitive, Leaded Process Compatible=Yes, No. of Pins=8, Packaging="Cut Tape", Peak Reflow Compatible (260 C)=Yes, Pricing 1="100=13.671, 300=13.23, 500=12.789 (USD)", Response Time=8s, RoHS Compliant=Yes, Sensing Accuracy=3%, Sensitivity="± 1%", Stock 1=500, Supplier 1=Digikey, SVHC="No SVHC (20-Jun-2013)"
U6: "MAXIM INTEGRATED PRODUCTS         DS18B20+.             12bit,  0.5C 1 Wire Digital Thermometer with Programmable Resolution in TO-92-3 Package", Manufacturer=Maxim, Manufacturer Part Number=DS18B20+, Operating Temperature Max=125°C, Operating Temperature Min=-55°C, Operating Temperature Range="-55°C to +125°C", Output Current=4mA, Package / Case=TO-92, Sensing Temperature Max=+125°C, Supply Current=1mA, Supply Voltage Max=5.5V, Supply Voltage Min=3V, Supply Voltage Range="3V to 5.5V", Base Number=18, ComponentLink1Description=https://datasheet.ciiva.com/14100/ds18b20-eng-tds-14100018.pdf, ComponentLink1URL=https://datasheet.ciiva.com/14100/ds18b20-eng-tds-14100018.pdf, ComponentLink2Description=https://datasheet.ciiva.com/46354/136-ds18b20-46354613.pdf, ComponentLink2URL=https://datasheet.ciiva.com/46354/136-ds18b20-46354613.pdf, ComponentLink3Description=https://datasheet.ciiva.com/23809/46379-23809287.pdf, ComponentLink3URL=https://datasheet.ciiva.com/23809/46379-23809287.pdf, ComponentLink4Description=https://datasheet.ciiva.com/16470/ds18b20-16470492.pdf, ComponentLink4URL=https://datasheet.ciiva.com/16470/ds18b20-16470492.pdf, ComponentLink5Description=https://datasheet.ciiva.com/19456/865936-19456316.pdf, ComponentLink5URL=https://datasheet.ciiva.com/19456/865936-19456316.pdf, ComponentLink6Description=https://datasheet.ciiva.com/2003/ds18b20-2003437.pdf, ComponentLink6URL=https://datasheet.ciiva.com/2003/ds18b20-2003437.pdf, ComponentLink7Description=https://datasheet.ciiva.com/3277/ds18b20-3277869.pdf, ComponentLink7URL=https://datasheet.ciiva.com/3277/ds18b20-3277869.pdf, ComponentLink8Description=https://datasheet.ciiva.com/5696/ds18s20-5696782.pdf, ComponentLink8URL=https://datasheet.ciiva.com/5696/ds18s20-5696782.pdf, ComponentLink9Description=https://datasheet.ciiva.com/26887/ds18b20-26887123.pdf, ComponentLink9URL=https://datasheet.ciiva.com/26887/ds18b20-26887123.pdf, Device Marking=DS18B20+, IC Generic Number=18B20, IC Output Type=Digital, Logic Function Number=18B20, MSL="(Not Available)", No. of Pins=3, Pricing 1="1=2.78, 10=2.678 (USD)", Resolution=12bit, Resolution (Bits)=12bit, Sensing Accuracy Range="± 0.5°C", Sensing Temperature Min=-55°C, Sensor / Transducer Type=Temperature, Sensor Case Style=TO-92, Stock 1=9817, Supplier 1=Digikey, SVHC="To Be Advised", Temperature Sensing Range="-55°C to +125°C"
U7: "802.11n Wireless Module"
U8: Frequency Range="300 MHz to 348 MHz, 391 MHz to 464 MHz, 782 MHz to 928 MHz", Manufacturer="Texas Instruments (TI)", Manufacturer Part Number=CC1101RGP, Maximum Operating Temperature="+ 85 C", Minimum Operating Temperature="- 40 C", Operating Supply Voltage="1.8 V to 3.6 V", Output Power="12 dBm", Package / Case=VQFN-20, Supplier Part Number 1=CC1101RGP-ND, Supply Current Receiving="14 mA", Supply Voltage - Max="3.6 V", Supply Voltage - Min="1.8 V", Brand="Texas Instruments", ComponentLink1Description=https://datasheet.ciiva.com/23815/1719597-23815626.pdf, ComponentLink1URL=https://datasheet.ciiva.com/23815/1719597-23815626.pdf, ComponentLink2Description=https://datasheet.ciiva.com/15309/swrs061i-317099-15309888.pdf, ComponentLink2URL=https://datasheet.ciiva.com/15309/swrs061i-317099-15309888.pdf, ComponentLink3Description=https://datasheet.ciiva.com/26913/getdatasheetpartid-739309-26913178.pdf, ComponentLink3URL=https://datasheet.ciiva.com/26913/getdatasheetpartid-739309-26913178.pdf, Factory Pack Quantity=92, Interface Type=SPI, Maximum Data Rate="500 kb/s", Modulation Format="2-FSK, 4-FSK, ASK, GFSK, MSK, OOK", Mounting Style=SMD/SMT, Number of Receivers=1, Number of Transmitters=1, Order Link=https://item.taobao.com/item.htm?spm=a1z09.2.0.0.0HJvpv&id=36617396595&_u=88jolfh2abc, Packaging=Tube, Pricing 1="184=4.059 (USD)", Product Category="RF Transceiver", RoHS=Details, Sensitivity="- 116 dBm", Series=CC1101, Stock 1=0, Supplier 1=Digikey, Type=Wi-Fi
U10: "+5V Powered, Multi-Channel RS-232 Driver/Receiver", PackageDocument=1997, Code_JEDEC=MS-001-BB, ComponentLink1Description="Manufacturer Link", ComponentLink1URL=http://www.maxim-ic.com/, ComponentLink2Description=Datasheet, ComponentLink2URL=http://pdfserv.maxim-ic.com/en/ds/MAX220-MAX249.pdf, LatestRevisionDate=6-Jun-2005, LatestRevisionNote="Stylized 3D Model Added.", PackageReference=PE16A, Published=16-Jan-2001, Publisher="Altium Limited"
U11: "IC FLASH 256MBIT 104MHZ 16SOP", Clock Frequency-Max="104 MHz", Manufacturer=Macronix, Manufacturer Part Number=MX25L25635FMI-10G, Supply Voltage-Nom="2.7 to 3.6 V", Temperature Grade=Industrial, ComponentLink1Description=http://media.digikey.com/pdf/Data%20Sheets/Macronix/MX25L25635F.pdf, ComponentLink1URL=http://media.digikey.com/pdf/Data%20Sheets/Macronix/MX25L25635F.pdf, Memory Density="256 Mb", Memory Organization="256 M x 1 / 128 M ...", Pricing 1="1=3.84 (USD)", Stock 1=4642, Supplier 1=Digikey
Y1: "Crystal Oscillator", LatestRevisionDate=17-Jul-2002, LatestRevisionNote="Re-released for DXP Platform.", PackageDescription="Crystal, Thru-Hole; 2 Leads; Body 3.1 x 8.2 mm (Dia.xH)", PackageReference=R38, Published=8-Jun-2000, Publisher="Altium Limited"
L1: Code_IEC=1005, Code_JEITA=0402, LatestRevisionDate=29-May-2009, LatestRevisionNote="IPC-7351 Footprint Added.", PackageDescription="Chip Inductor", PackageReference=0402-A, Published=8-Jun-2000, Publisher="Altium Limited"
U9: =8711AF

## Free pads (board coordinates)
  round 0.6 all layers, no hole: 3(31.877,29.337)

## Via types
v1: diameter 0.6, hole 0.3, Top Layer to Bottom Layer, 130 vias
v2: diameter 0.686, hole 0.381, Top Layer to Bottom Layer, 29 vias
v3: diameter 0.635, hole 0.305, Top Layer to Bottom Layer, 16 vias
v4: diameter 4, hole 3.5, Top Layer to Bottom Layer, 4 vias
v5: diameter 5, hole 3, Top Layer to Bottom Layer, 2 vias
v6: diameter 1.5, hole 1.4, Top Layer to Bottom Layer, 2 vias
v7: diameter 3.2, hole 3, Top Layer to Bottom Layer, 2 vias
v8: diameter 0.584, hole 0.279, Top Layer to Bottom Layer, 1 vias
v9: diameter 0.635, hole 0.381, Top Layer to Bottom Layer, 1 vias

## Nets (pads, with @x,y where several pads share a name; then routed paths per layer and width w, separated by ;. In a path a pad name is that pad's centre, name@x,y a point inside that pad or via, vN(x,y) a via of type N, cw(c..) or ccw(c..) an arc to the next point about the centre after c; other vN are vias at no path point)
88W8782_SDIO_CTL: R40.1 U3.41 U7.9 | length 85.2
  Top Layer w0.254: U7.9@39.497,38.076 46.76,38.076 49.022,35.814 54.732,35.814 55.305,36.387 57.847,36.387 R40.1@58.928,35.306 ; v1(68.707,49.149) 68.715,49.149 72.479,52.913 72.479,53.513 71.755,54.237 v1(71.755,62.103) ; v1(78.867,73.787) 80.391,73.787 80.442,73.838 v1(80.442,73.914) ; v1(82.423,73.406) v1(86.36,73.406) ; v1(86.36,77.089) 86.36,77.216 86.376,77.232 U3.41@89.408,77.232
  Bottom Layer w0.254: R40.1@58.928,35.306 64.338,40.716 64.338,45.034 68.453,49.149 v1(68.707,49.149) ; v1(71.755,62.103) 71.755,70.104 75.438,73.787 v1(78.867,73.787) ; v1(80.442,73.914) 81.661,73.914 82.169,73.406 v1(82.423,73.406) ; v1(86.36,73.406) v1(86.36,77.089)
+3.3V_WIFI: C24.1 D4.1 P10.1 R42.2 U9.34 | length 76.1
  Top Layer w0.254: v1(124.714,54.864) 124.69,54.888 U9.34@124.69,61.408 124.69,64.746 v1(125.095,65.151)
  Bottom Layer w0.254: v1(124.714,54.864) v1(124.714,44.196) D4.1@134.874,34.036 ; v1(125.095,65.151) 128.143,68.199 128.143,75.057 C24.1@128.016,75.184 130.708,77.876 132.41,77.876 137.008,82.474 137.008,86.254 133.604,89.657 133.604,91.683 ; P10.1@129.678,87.757 133.604,91.683 ; R42.2@133.604,92.71 133.604,91.683
AGND: C9.2 R4.1 U3.12 | length 42.8
  Top Layer w0.203: v1(98.171,79.375) 98.298,79.248 99.477,79.248 99.493,79.232 U3.12@100.608,79.232 ; v1(99.568,83.439) 99.568,84.836 101.981,87.249 C9.2@104.521,87.249 ; v1(100.457,71.12) 100.457,60.198 103.124,57.531 R4.1@103.124,53.086
  Bottom Layer w0.203: v1(99.568,83.439) 99.568,80.772 v1(98.171,79.375) 100.076,77.47 100.076,71.501 v1(100.457,71.12)
AVDD: C9.1 R3.1 U3.13 | length 22.5
  Top Layer w0.203: 101.747,79.756 v1(104.14,79.756) ; C9.1@104.521,89.789 105.537,89.789 107.315,88.011 R3.1@107.315,84.709
  Bottom Layer w0.203: v1(104.14,79.756) 104.648,80.264 106.172,80.264 106.489,79.947 106.489,78.705 106.899,78.295 107.759,78.295 107.823,78.232 109.22,79.629 109.22,81.661 107.315,83.566 R3.1@107.315,84.709
BOOT0: R13.1 U3.60 | length 49.7
  Top Layer w0.254: U3.60@96.758,71.882 96.829,71.811 96.829,68.652 v1(96.901,68.58) ; v1(104.537,69.612) 116.602,69.612 118.923,71.933 120.853,71.933 121.615,72.695 121.615,74.625 v1(122.047,75.057) ; v1(112.522,82.55) 115.443,82.55 v1(116.078,81.915)
  Bottom Layer w0.254: v1(96.901,68.58) 99.1,68.58 99.118,68.562 99.612,68.562 99.63,68.58 103.505,68.58 v1(104.537,69.612) ; v1(112.522,82.55) 112.522,83.907 R13.1@112.943,84.328 ; v1(116.078,81.915) 119.888,81.915 122.031,79.772 122.031,75.073 v1(122.047,75.057)
BOOT1: R14.1 U3.28 | length 29.6
  Top Layer w0.203: U3.28@93.258,83.082 93.258,84.8 v1(93.269,84.811) ; v1(103.505,83.312) 103.607,83.21 118.288,83.21 R14.1@119.786,84.709
  Bottom Layer w0.203: v1(93.269,84.811) 93.294,84.836 99.822,84.836 100.33,84.328 102.489,84.328 v1(103.505,83.312)
BUTTON: B2.3 B2.4 | length 6.5
  Top Layer w0.254: B2.3@138.28,76.2 B2.4@144.78,76.2
BUTTON1: B4.3 B4.4 U3.15 | length 68.7